# Allegro board DNJEH.brd
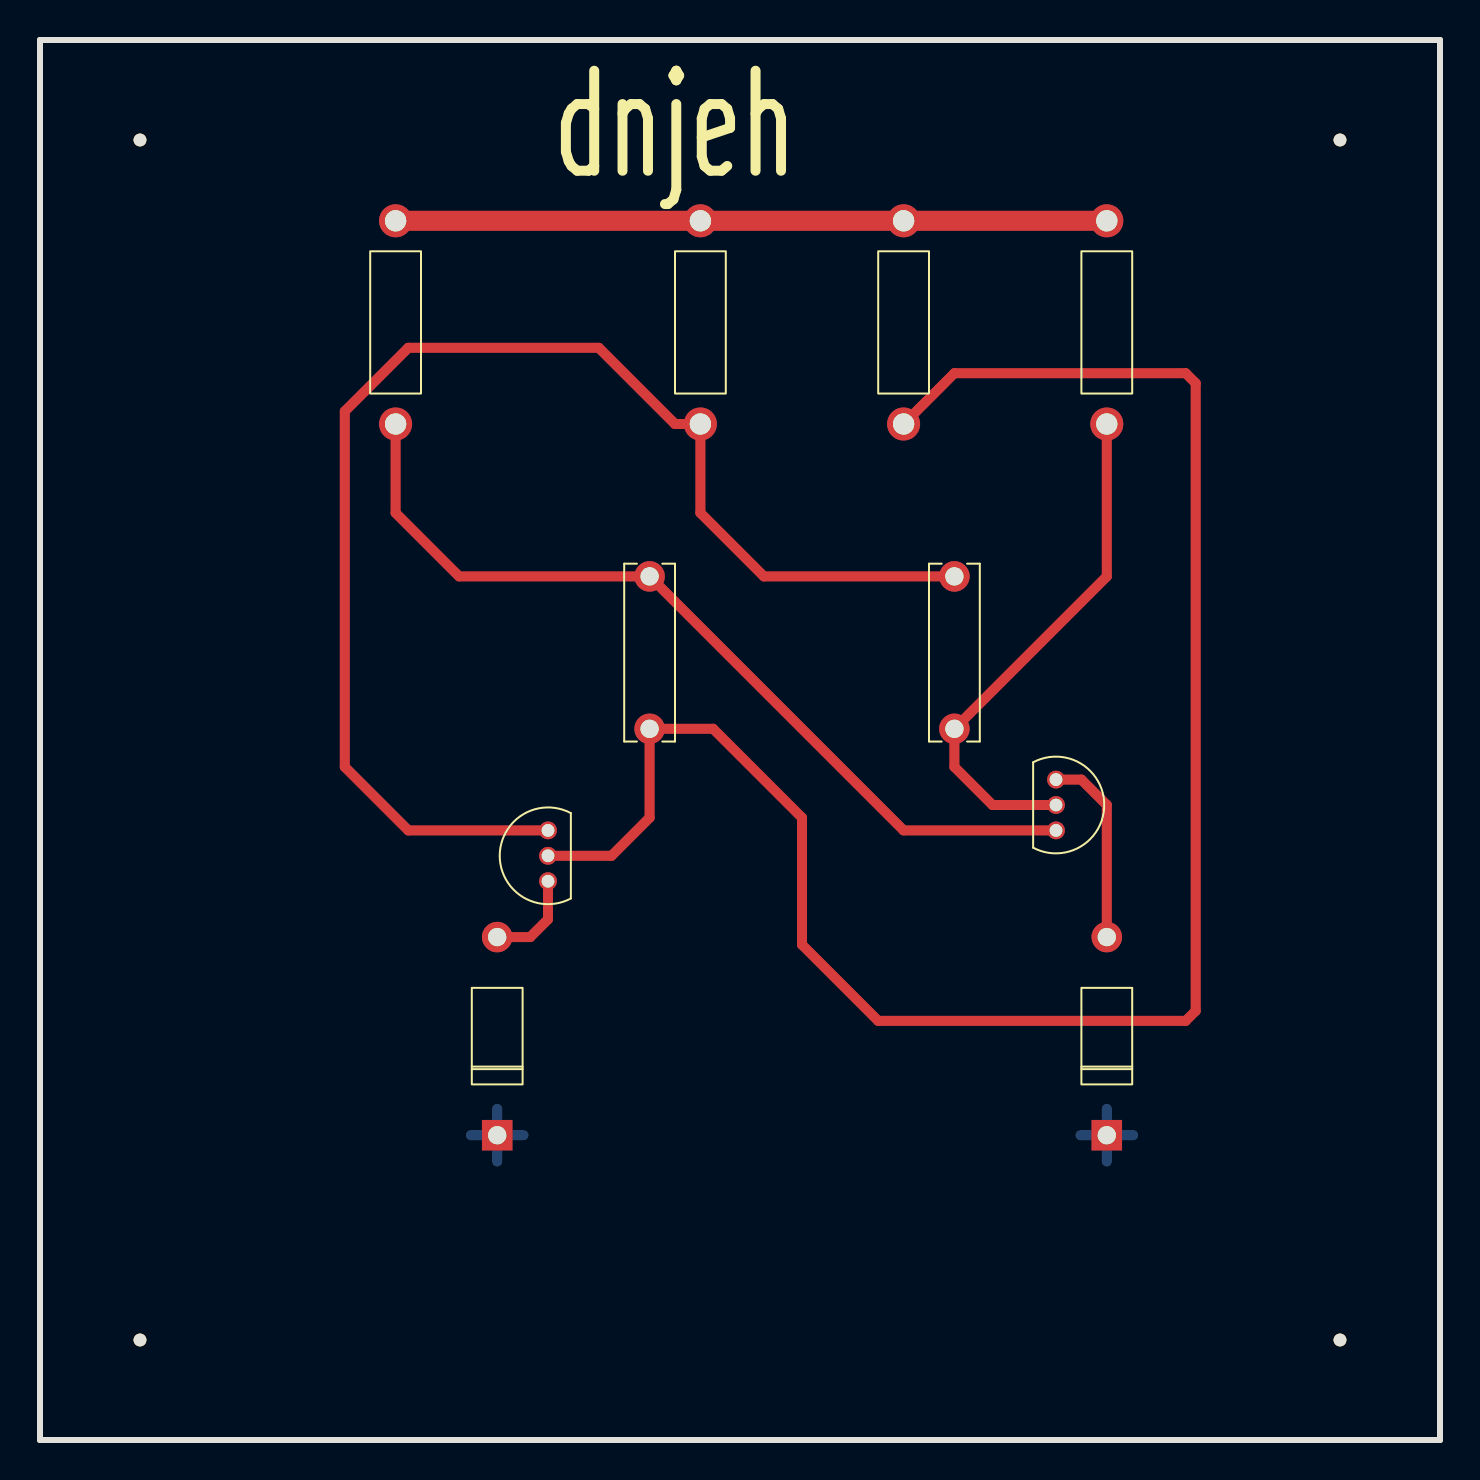
[diagram p0: board, top side]
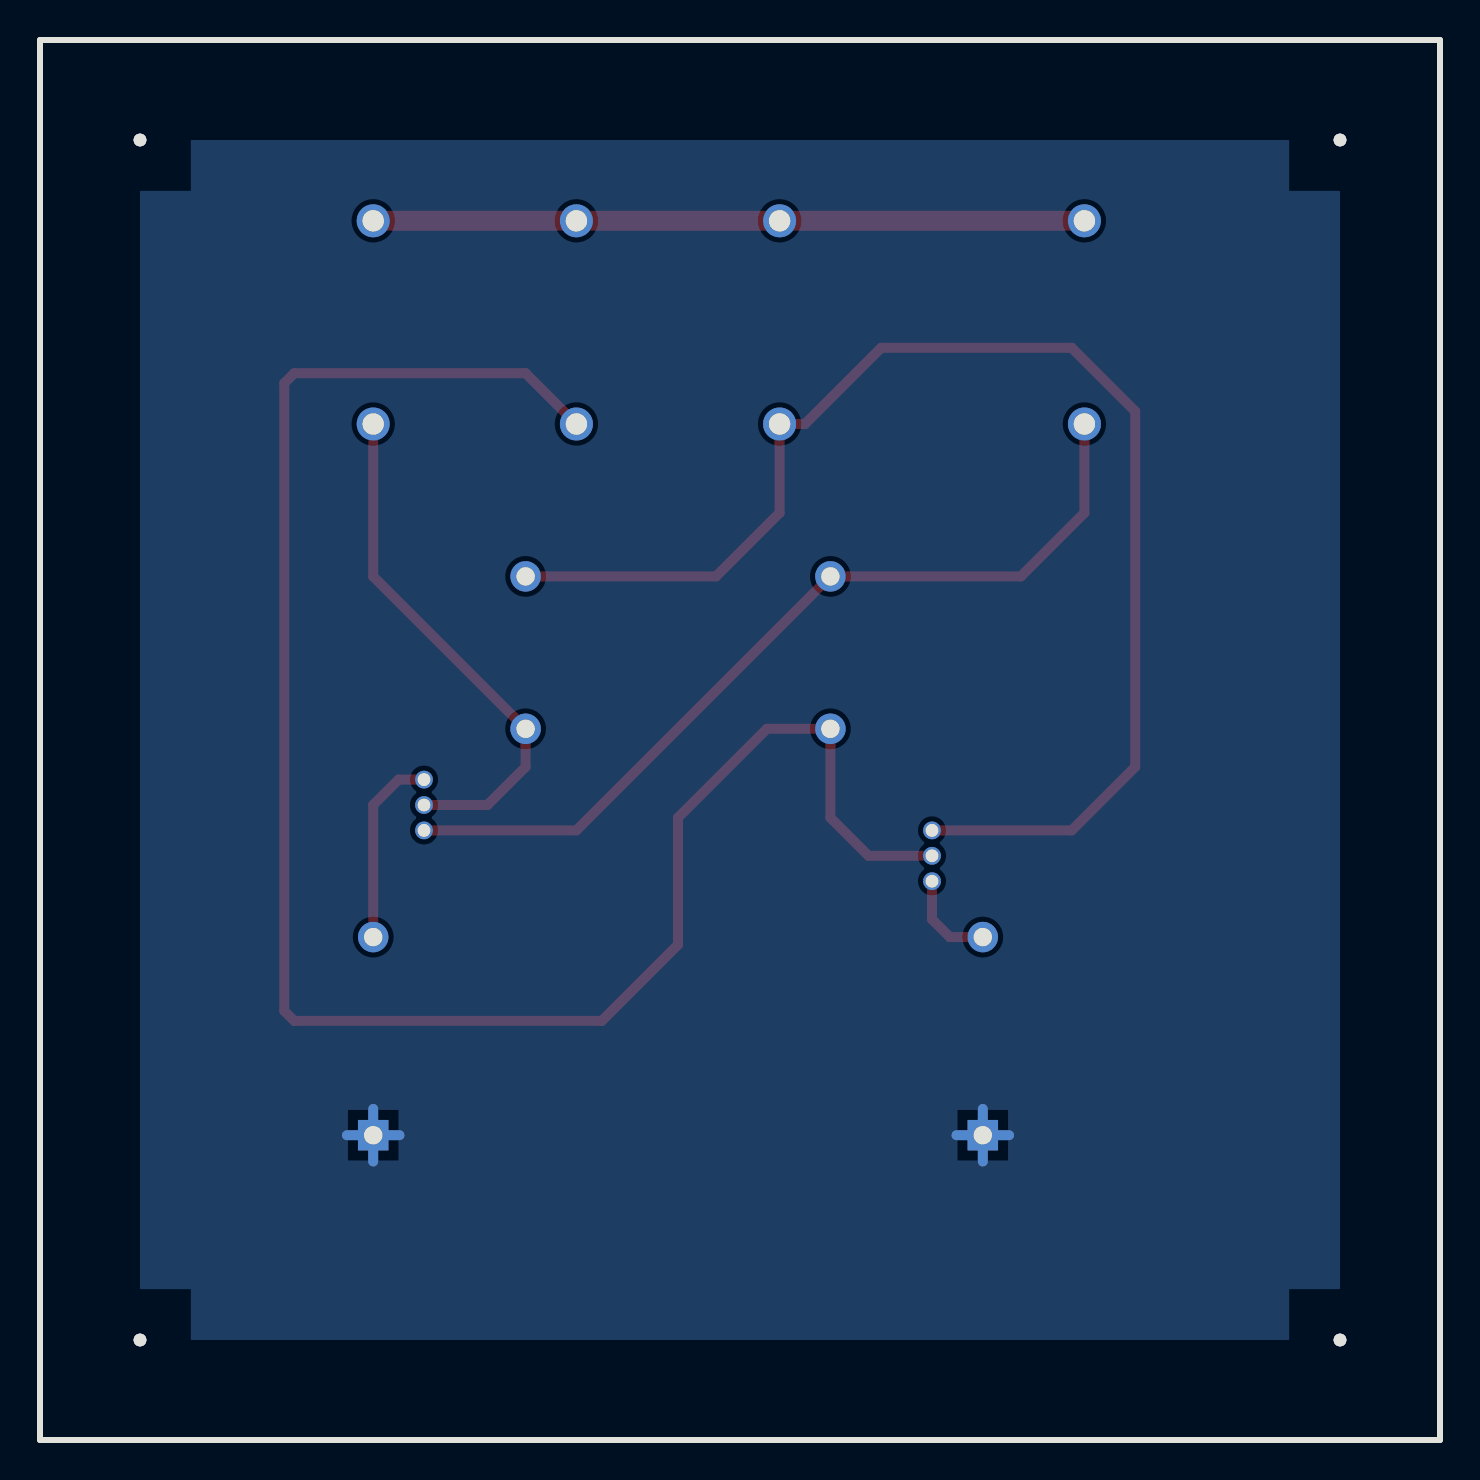
[diagram p1: board, bottom side, seen from below]

Outline 70 x 70 mm; copper layers: TOP, BOTTOM. Coordinates in mm from the lower left corner of the outline.
Outline path: 0,70 0,0 70,0 70,70 0,70

## Design rules (mm)
nets with their own width: min track width 1; nets 12V GND

## Placement (name value [footprint] x y rotation side)
C1  CAP NP  [CAP300]  30.48 35.56 90 top
C2  CAP NP  [CAP300]  45.72 43.18 270 top
D1  DIODE  [DO41]  22.86 15.24 0 top
D2  DIODE  [DO41]  53.34 15.24 0 top
NOREF  -  []  65 65 0 top
NOREF#2  -  [unnamed#2]  65 5 0 top
NOREF#3  -  []  5.08 0 90 top
NOREF#4  -  [unnamed#2]  5 5 0 top
NOREF#5  -  [unnamed#2]  65 65 0 top
NOREF#6  -  []  5 65 90 top
NOREF#7  -  []  0 66.04 0 top
NOREF#8  -  []  5 65 0 top
NOREF#9  -  [unnamed#2]  5 65 0 top
NOREF#10  -  []  5 5 90 top
NOREF#11  -  []  0 0 90 top
NOREF#12  -  []  0 70 0 top
Q1  NPN ECB  [TO92]  25.4 27.94 180 top
Q2  NPN ECB  [TO92]  50.8 33.02 0 top
R1  27K  [RES400]  17.78 60.96 180 top
R2  27K  [RES400]  33.02 60.96 180 top
R3  1K  [RES400]  43.18 60.96 180 top
R4  1K  [RES400]  53.34 60.96 180 top

## Library data of the parts
C1 C2 = CAP NP: Tolerance: ***; User Part Number: ***
D1 D2 = DIODE
Q1 Q2 = NPN ECB
R1-R4 = RESISTOR: Tolerance: ***; User Part Number: ***

## Footprints (pads in the part's own frame, mm; a bottom-side part is the same pattern mirrored in y, then rotated)
CAP300
  round 1.524 hole 0.914: 1(0,0) 2(7.62,0)
DO41
  rect 1.524x1.524 hole 0.914: 1(0,0)
  round 1.524 hole 0.914: 2(0,9.906)
RES400
  round 1.651 hole 1.067: 1(0,0) 2(0,10.16)
TO92
  round 0.889 hole 0.635: 1(0,0) 2(0,-1.27) 3(0,-2.54)
unnamed#2
  round 0.635 hole 3.175 unplated: (0,0)

## Nets
12V: R1.1 R2.1 R3.1 R4.1
GND: D1.1(K) D2.1(K)
N00267: C1.1 Q1.2(C) R3.2
N00281: C1.2 Q2.3(B) R1.2
N00288: C2.1 Q1.3(B) R2.2
N00295: C2.2 Q2.2(C) R4.2
N00334: D2.2(A) Q2.1(E)
N00338: D1.2(A) Q1.1(E)

## Routing (per net, layer and track width the routed paths; a pad name or vN(x,y) marks a point on that pad's centre or on a via; arc(x,y) is an arc through that point)
12V: length 35.6
  TOP w1: R1.1 R2.1 R3.1 R4.1
GND: length 10.5
  BOTTOM w0.5: D2.1 53.34,16.55 ; D2.1 53.34,13.93 ; D2.1 52.02,15.24 ; D2.1 54.66,15.24 ; D1.1 24.18,15.24 ; D1.1 21.55,15.24 ; D1.1 22.86,13.93 ; D1.1 22.86,16.55
N00267: length 94.8
  TOP w0.5: R3.2 45.72,53.34 57.28,53.34 57.78,52.84 57.78,21.45 57.28,20.95 41.91,20.95 38.1,24.77 38.1,31.11 33.66,35.56 C1.1 30.48,31.11 28.57,29.21 Q1.2
N00281: length 44
  TOP w0.5: Q2.3 43.18,30.48 C1.2 20.95,43.18 17.78,46.35 R1.2
N00288: length 68.4
  TOP w0.5: Q1.3 18.41,30.48 15.24,33.66 15.24,51.44 18.41,54.61 27.94,54.61 31.75,50.8 R2.2 33.02,46.35 36.2,43.18 C2.1
N00295: length 26.2
  TOP w0.5: R4.2 53.34,43.18 C2.2 45.72,33.66 47.62,31.75 Q2.2
N00334: length 9.7
  TOP w0.5: Q2.1 52.07,33.02 53.34,31.75 D2.2
N00338: length 4.8
  TOP w0.5: Q1.1 25.4,26.04 24.51,25.15 D1.2

## Copper pours and planes (outline as drawn; the poured copper is in the pictures)
GND on BOTTOM: 5,5 5,65 65,65 65,5

## Text on the board
Ref Des/Silkscreen Top: dnjeh
DIMENSION: FIGURE | SIZE | 0.635 | 0.914 | 1.067 | 3.175 | DRILL CHART: TOP to BOTTOM | ALL UNITS ARE IN MILLIMETERS | PLATED | NON-PLATED | QTY | 6 | 8 | 4
